# Altium PCB sw108-10.25.PcbDoc (part 2 of 2)
Units mm, origin at the board's own origin, x right, y up, seen from the top; angles counter-clockwise.
Board outline 60 x 92 mm, 2 copper layers (Top Layer, Bottom Layer); 64 components, 32 nets, 243 pads, 39 vias.
Unrouted connection lines stored in the file: 1.
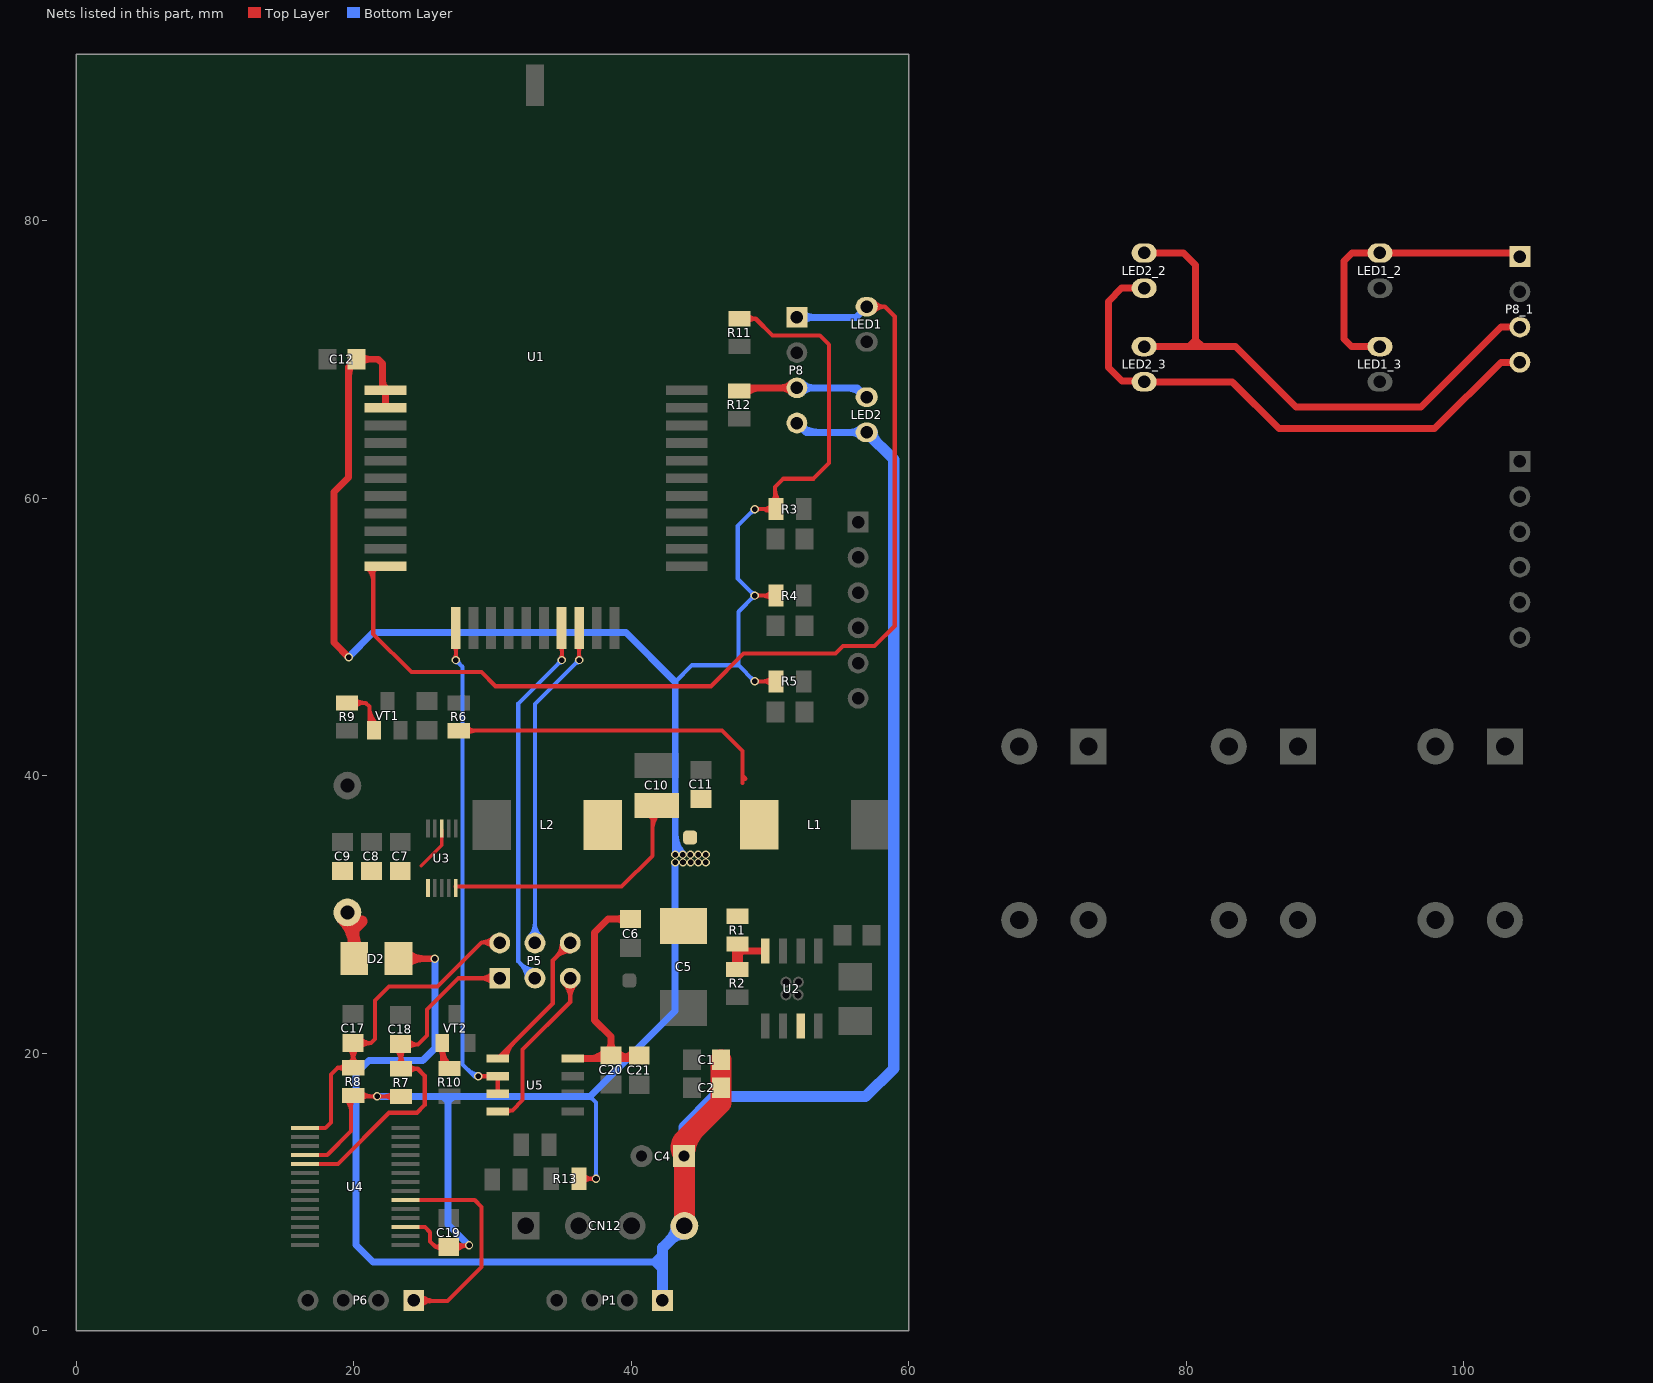
[diagram p2: the nets of this part, all layers, seen from the top]

## Via types
v1: diameter 0.6, hole 0.4, Top Layer to Bottom Layer, 39 vias

## Nets (pads, with @x,y where several pads share a name; then routed paths per layer and width w, separated by ;. In a path a pad name is that pad's centre, name@x,y a point inside that pad or via, vN(x,y) a via of type N, cw(c..) or ccw(c..) an arc to the next point about the centre after c; other vN are vias at no path point) (continued)
NetLED2_2: LED2.2 LED2_2.2 LED2_3.2 P8.3 P8_1.3 R12.2 | length 61.4
  Top Layer w0.5: R12.2@47.79,67.72 48.02,67.95 P8.3@51.95,67.95 ; LED2_3.2@76.974,70.92 83.574,70.92 87.914,66.58 96.934,66.58 102.684,72.33 P8_1.3@104.054,72.33 ; LED2_2.2@76.974,77.67 79.824,77.67 80.684,76.81 80.684,71.41 ; 80.194,70.92 80.684,71.41 ; 81.174,70.92 80.684,71.41 ; 50.743,67.95 cw(c50.743,66.743) 51.596,67.596 ccw(c50.743,66.743) 50.743,67.95 ; 50.743,67.95 ccw(c50.743,69.157) 51.596,68.304 cw(c50.743,69.157) 50.743,67.95 ; R12.2@48.252,67.508 cw(c49.32,66.44) 49.32,67.95 ccw(c49.32,66.44) R12.2@48.252,67.508
  Bottom Layer w0.5: P8.3@51.95,67.95 56.31,67.95 LED2.2@56.98,67.28 ; P8.3@52.304,67.596 cw(c53.157,66.743) 53.157,67.95 cw(c53.157,69.157) P8.3@52.304,68.304 ; 55.383,67.95 cw(c55.383,65.783) LED2.2@56.915,67.315
NetP6_1: P6.1 U4.20 | length 21.9
  Top Layer w0.3: U4.20@23.739,9.41 28.73,9.41 29.22,8.92 29.22,4.59 26.76,2.13 24.38,2.13 P6.1@24.33,2.18 ; P6.1@24.542,2.392 ccw(c25.175,3.025) 25.175,2.13 cw(c25.175,3.025) P6.1@24.542,2.392 ; P6.1@24.754,1.756 cw(c25.658,0.852) 25.658,2.13 ccw(c25.658,0.852) P6.1@24.754,1.756 ; P6.1@24.754,2.604 ccw(c25.899,3.749) 25.899,2.13 cw(c25.899,3.749) P6.1@24.754,2.604
NetR1_1: R1.1 R2.1 U2.4 | length 6
  Top Layer w0.5: 47.66,26.98 48.03,27.35 U2.4@49.676,27.35 ; R1.1@47.757,27.741 ccw(c48.599,28.452) 48.599,27.35 cw(c48.599,28.452) R1.1@47.757,27.741
  Top Layer w0.8: R2.1@47.65,26.03 47.66,26.04 47.66,26.98 R1.1@47.66,27.92
NetR9_1: R9.1 VT1.1 | length 11
  Top Layer w0.3: R9.1@19.53,45.24 20.87,45.24 21.14,44.97 ; VT1.1@21.16,43.51 21.14,43.53 21.14,44.97 ; 20.746,45.24 cw(c20.746,46.206) 20.063,45.523 ccw(c20.746,46.206) 20.746,45.24 ; 20.746,45.24 ccw(c20.746,44.274) 20.063,44.957 cw(c20.746,44.274) 20.746,45.24 ; 21.14,44.97 ccw(c22.876,44.97) 21.714,43.68 cw(c22.876,44.97) 21.14,44.97 ; 21.14,44.296 ccw(c22.269,44.296) 21.513,43.457 cw(c22.269,44.296) 21.14,44.296
NetR10_1: R10.1 VT2.1 | length 9.5
  Top Layer w0.3: VT2.1@26.39,20.73 26.39,19.41 R10.1@26.91,18.89 ; 26.39,19.735 cw(c27.235,19.735) 26.637,20.333 ccw(c27.235,19.735) 26.39,19.735 ; 26.39,19.735 ccw(c25.545,19.735) 26.143,20.333 cw(c25.545,19.735) 26.39,19.735 ; 26.39,19.783 ccw(c27.553,19.783) 26.731,18.961 cw(c27.553,19.783) 26.39,19.783 ; VT2.1@26.39,20.508 ccw(c28.278,20.508) 26.943,19.173 cw(c28.278,20.508) VT2.1@26.39,20.508
PA1: LED1.2 LED1_2.2 LED1_3.2 P8.1 P8_1.1 U1.11 | length 109.7
  Top Layer w0.3: U1.11@21.1,54.98 21.41,54.67 ; U1.11@21.72,54.98 21.41,54.67 ; LED1.2@56.98,73.8 58.28,73.8 ; 21.41,54.67 21.41,50.21 24.16,47.46 29.21,47.46 30.23,46.44 45.76,46.44 48.11,48.79 54.74,48.79 55.28,49.33 57.55,49.33 59,50.78 59,73.08 58.28,73.8 ; 58.28,73.8 cw(c58.28,74.834) 57.497,74.159 ccw(c58.28,74.834) 58.28,73.8 ; 58.28,73.8 ccw(c58.28,72.766) 57.497,73.441 cw(c58.28,72.766) 58.28,73.8 ; U1.11@21.005,54.939 cw(c20.026,53.96) 21.41,53.96 ccw(c20.026,53.96) U1.11@21.005,54.939 ; U1.11@21.136,54.88 cw(c21.122,54.592) 21.41,54.592 ccw(c21.122,54.592) U1.11@21.136,54.88 ; U1.11@21.217,55.151 cw(c20.75,54.684) 21.41,54.684 ccw(c20.75,54.684) U1.11@21.217,55.151 ; U1.11@21.313,54.971 ccw(c21.465,54.871) 21.337,54.743 cw(c21.465,54.871) U1.11@21.313,54.971
  Top Layer w0.5: LED1_3.2@93.974,70.92 91.914,70.92 91.374,71.46 91.374,77.08 91.964,77.67 103.794,77.67 P8_1.1@104.054,77.41
  Bottom Layer w0.5: P8.1@51.95,73.03 56.21,73.03 LED1.2@56.98,73.8 ; 53.157,73.03 cw(c53.157,74.237) 52.304,73.384 ccw(c53.157,74.237) 53.157,73.03 ; 53.157,73.03 ccw(c53.157,71.823) 52.304,72.676 cw(c53.157,71.823) 53.157,73.03
SHINENG: U1.12 U5.2 U5.3 | length 45
  Top Layer w0.3: v1(27.368,48.33) U1.12@27.368,50.643 ; v1(28.98,18.33) 30.384,18.33 U5.2@30.39,18.336 U5.3@30.39,17.066 U5.3@30.336,17.12 ; 27.368,48.692 cw(c27.006,48.692) 27.262,48.436 ccw(c27.006,48.692) 27.368,48.692 ; 27.368,48.692 ccw(c27.73,48.692) 27.474,48.436 cw(c27.73,48.692) 27.368,48.692 ; 27.368,49.01 cw(c27.851,49.01) 27.509,49.352 ccw(c27.851,49.01) 27.368,49.01 ; 27.368,49.01 ccw(c26.885,49.01) 27.227,49.352 cw(c26.885,49.01) 27.368,49.01 ; 29.342,18.33 cw(c29.342,18.692) 29.086,18.436 ccw(c29.342,18.692) 29.342,18.33 ; 29.342,18.33 ccw(c29.342,17.968) 29.086,18.224 cw(c29.342,17.968) 29.342,18.33 ; 30.39,17.428 cw(c30.028,17.428) 30.284,17.172 ccw(c30.028,17.428) 30.39,17.428 ; 30.39,17.428 ccw(c30.752,17.428) 30.496,17.172 cw(c30.752,17.428) 30.39,17.428 ; 30.39,17.974 cw(c30.752,17.974) 30.496,18.23 ccw(c30.752,17.974) 30.39,17.974 ; 30.39,17.974 ccw(c30.028,17.974) 30.284,18.23 cw(c30.028,17.974) 30.39,17.974 ; 29.513,18.33 ccw(c29.513,18.714) 29.784,18.442 cw(c29.513,18.714) 29.513,18.33 ; 29.543,18.33 cw(c29.543,17.989) 29.784,18.23 ccw(c29.543,17.989) 29.543,18.33
  Bottom Layer w0.3: v1(27.368,48.33) 27.37,48.33 27.858,47.842 27.858,19.192 28.72,18.33 v1(28.98,18.33) ; 28.28,18.77 ccw(c28.98,19.47) v1@28.98,18.48 ; v1@27.368,48.18 cw(c27.368,47.813) 27.627,48.073 ccw(c27.368,47.813) v1@27.368,48.18 ; v1@27.518,48.33 ccw(c27.875,48.33) 27.623,48.077 cw(c27.875,48.33) v1@27.518,48.33
UART_RXD: P5.5 U1.19 | length 30.1
  Top Layer w0.3: v1(36.25,48.33) 36.25,50.635 U1.19@36.258,50.643 ; 36.25,48.692 cw(c35.888,48.692) 36.144,48.436 ccw(c35.888,48.692) 36.25,48.692 ; 36.25,48.692 ccw(c36.612,48.692) 36.356,48.436 cw(c36.612,48.692) 36.25,48.692 ; U1.19@36.117,49.352 cw(c35.794,49.029) 36.25,49.029 ccw(c35.794,49.029) U1.19@36.117,49.352 ; 36.25,48.991 cw(c36.76,48.991) 36.399,49.352 ccw(c36.76,48.991) 36.25,48.991
  Bottom Layer w0.3: P5.5@32.646,28.364 ccw(c31.621,29.389) 33.07,29.389 ccw(c34.519,29.389) P5.5@33.494,28.364 ; P5.5@33.07,27.94 33.07,45.15 v1(36.25,48.33) ; 35.994,48.074 cw(c36.25,47.818) 36.25,48.18 ccw(c36.25,47.818) 35.994,48.074 ; 35.994,48.074 ccw(c35.738,48.33) 36.1,48.33 cw(c35.738,48.33) 35.994,48.074
"UART_RXD 485": P5.6 U5.1 | length 19
  Top Layer w0.3: U5.1@30.39,19.606 34.35,23.566 34.35,26.68 P5.6@35.61,27.94 ; 34.586,26.916 cw(c35.61,25.891) 35.61,27.34 ccw(c35.61,25.891) 34.586,26.916 ; 34.586,26.916 ccw(c33.561,27.94) 35.01,27.94 cw(c33.561,27.94) 34.586,26.916 ; U5.1@30.44,19.606 cw(c30.561,19.606) 30.475,19.692 ccw(c30.561,19.606) U5.1@30.44,19.606 ; U5.1@30.74,19.606 cw(c31.585,19.606) 30.987,20.204 ccw(c31.585,19.606) U5.1@30.74,19.606 ; U5.1@31.04,19.606 cw(c32.609,19.606) 31.5,20.716 ccw(c32.609,19.606) U5.1@31.04,19.606
UART_RXD_USB: C18.2 P5.1 R7.1 U4.5 | length 44.3
  Top Layer w0.3: U4.5@16.5,12.01 18.87,12.01 22.56,15.7 24.57,15.7 25.12,16.25 25.12,18.37 24.62,18.87 ; R7.1@23.3,18.75 R7.1@23.42,18.87 ; C18.2@23.37,20.66 C18.2@23.42,20.61 ; P5.1@30.53,25.4 27.55,25.4 25.3,23.15 25.3,21.27 24.64,20.61 ; R7.1@23.42,18.87 24.62,18.87 ; R7.1@23.42,18.87 C18.2@23.42,20.61 ; 23.42,19.836 cw(c22.454,19.836) 23.137,19.153 ccw(c22.454,19.836) 23.42,19.836 ; 23.42,19.836 ccw(c24.386,19.836) 23.703,19.153 cw(c24.386,19.836) 23.42,19.836 ; C18.2@23.42,20.61 24.64,20.61 ; 24.62,18.87 cw(c24.62,19.798) 23.956,19.15 ccw(c24.62,19.798) 24.62,18.87 ; 24.62,18.87 ccw(c24.62,17.942) 23.956,18.59 cw(c24.62,17.942) 24.62,18.87 ; 24.64,20.61 cw(c24.64,21.629) 23.855,20.979 ccw(c24.64,21.629) 24.64,20.61 ; 29.081,25.4 cw(c29.081,23.951) 30.106,24.976 ccw(c29.081,23.951) 29.081,25.4 ; 29.081,25.4 ccw(c29.081,26.849) 30.106,25.824 cw(c29.081,26.849) 29.081,25.4 ; C18.2@23.016,20.306 cw(c22.042,19.332) 23.42,19.332 ccw(c22.042,19.332) C18.2@23.016,20.306 ; 23.42,19.574 cw(c24.456,19.574) 23.724,20.306 ccw(c24.456,19.574) 23.42,19.574 ; C18.2@23.824,20.306 cw(c24.556,19.574) 24.556,20.61 ccw(c24.556,19.574) C18.2@23.824,20.306
UART_TXD: P5.2 U1.18 | length 33.1
  Top Layer w0.3: U1.18@34.988,50.643 35.01,50.621 v1(35.01,48.33) ; 35.01,48.692 cw(c34.648,48.692) 34.904,48.436 ccw(c34.648,48.692) 35.01,48.692 ; 35.01,48.692 ccw(c35.372,48.692) 35.116,48.436 cw(c35.372,48.692) 35.01,48.692 ; U1.18@34.847,49.352 cw(c34.452,48.957) 35.01,48.957 ccw(c34.452,48.957) U1.18@34.847,49.352 ; 35.01,49.063 cw(c35.418,49.063) 35.129,49.352 ccw(c35.418,49.063) 35.01,49.063
  Bottom Layer w0.3: P5.2@32.47,25.4 ccw(c31.021,25.4) 32.046,26.424 ccw(c33.07,27.449) P5.2@33.07,26 ; P5.2@33.07,25.4 31.87,26.6 31.87,45.19 v1(35.01,48.33) ; 34.754,48.074 cw(c35.01,47.818) 35.01,48.18 ccw(c35.01,47.818) 34.754,48.074 ; 34.754,48.074 ccw(c34.498,48.33) 34.86,48.33 cw(c34.498,48.33) 34.754,48.074
"UART_TXD 485": P5.3 U5.4 | length 17.9
  Top Layer w0.3: U5.4@30.39,15.796 30.464,15.87 31.44,15.87 32.18,16.61 32.18,20.26 35.61,23.69 P5.3@35.61,25.4 ; 35.61,23.951 cw(c37.059,23.951) 36.034,24.976 ccw(c37.059,23.951) 35.61,23.951 ; 35.61,23.951 ccw(c34.161,23.951) 35.186,24.976 cw(c34.161,23.951) 35.61,23.951 ; U5.4@30.996,15.69 cw(c31.43,15.256) 31.43,15.87 ccw(c31.43,15.256) U5.4@30.996,15.69
UART_TXD_USB: C17.2 P5.4 R8.1 U4.1 | length 41.2
  Top Layer w0.3: U4.1@16.5,14.61 17.96,14.61 18.36,15.01 18.36,18.45 18.85,18.94 ; C17.2@19.96,20.73 C17.2@19.97,20.72 ; P5.4@30.53,27.94 30.49,27.98 29.23,27.98 ; 18.85,18.94 cw(c18.85,18.194) 19.416,18.68 ccw(c18.85,18.194) 18.85,18.94 ; 18.85,18.94 ccw(c18.85,19.686) 19.416,19.2 cw(c18.85,19.686) 18.85,18.94 ; 18.85,18.94 R8.1@19.97,18.94 C17.2@19.97,20.72 ; 19.97,19.906 cw(c19.004,19.906) 19.687,19.223 ccw(c19.004,19.906) 19.97,19.906 ; 19.97,19.906 ccw(c20.936,19.906) 20.253,19.223 cw(c20.936,19.906) 19.97,19.906 ; C17.2@19.97,20.72 21.26,20.72 ; 21.26,20.72 cw(c21.26,21.887) 20.42,21.077 ccw(c21.26,21.887) 21.26,20.72 ; 21.26,20.72 21.55,21.01 21.55,23.78 22.56,24.79 26.04,24.79 29.23,27.98 ; 29.23,27.98 cw(c29.23,26.94) 30.054,27.574 ccw(c29.23,26.94) 29.23,27.98 ; 29.23,27.98 ccw(c29.23,29.169) 30.094,28.352 cw(c29.23,29.169) 29.23,27.98 ; C17.2@19.606,20.376 cw(c18.729,19.499) 19.97,19.499 ccw(c18.729,19.499) C17.2@19.606,20.376 ; 19.97,19.547 cw(c21.143,19.547) 20.314,20.376 ccw(c21.143,19.547) 19.97,19.547 ; C17.2@20.414,20.376 cw(c21.243,19.547) 21.243,20.72 ccw(c21.243,19.547) C17.2@20.414,20.376
VCC_9V: C7.2 C8.2 C9.2 D2.1 pad.0@19.55,30.14 U3.1 U3.8 | length 18.4
  Top Layer w0.254: 24.88,33.51 26.352,34.982 U3.8@26.352,36.081
  Top Layer w0.8: pad.0@19.46,29.5 20.038,28.922 ; D2.1@20.038,26.814 20.038,28.922 ; 20.616,29.5 20.038,28.922 ; 20.038,28.463 cw(c18.589,28.463) 19.614,27.438 ccw(c18.589,28.463) 20.038,28.463 ; 20.038,28.463 ccw(c21.487,28.463) 20.462,27.438 cw(c21.487,28.463) 20.038,28.463 ; pad.0@19.126,29.716 cw(c16.923,27.513) 20.038,27.513 ccw(c16.923,27.513) pad.0@19.126,29.716 ; pad.0@19.439,29.55 cw(c19.303,28.828) 20.038,28.828 ccw(c19.303,28.828) pad.0@19.439,29.55
VCC_24V: C1.2 C2.2 C4.1 CN12.4 D2.2 LED2.1 LED2_2.1 LED2_3.1 P1.1 P8.4 P8_1.4 U2.7 | length 218.3
  Top Layer w0.5: D2.2@22.97,26.79 22.98,26.8 v1(25.85,26.8) ; LED2_3.1@76.764,68.43 75.394,68.43 74.394,69.43 74.394,74.18 75.344,75.13 LED2_2.1@76.974,75.13 ; LED2_3.1@76.974,68.38 83.324,68.38 86.684,65.02 97.914,65.02 102.684,69.79 P8_1.4@104.054,69.79 ; D2.2@23.768,26.284 cw(c25.015,25.037) 25.015,26.8 ccw(c25.015,25.037) D2.2@23.768,26.284 ; D2.2@23.768,27.344 ccw(c25.082,28.658) 25.082,26.8 cw(c25.082,28.658) D2.2@23.768,27.344
  Top Layer w1.5: CN12.4@43.84,7.55 43.84,13.77 ; C1.2@46.48,19.52 46.47,19.51 46.47,16.4 43.84,13.77 ; 43.84,13.77 ccw(c44.418,13.192) 43.839,12.615 cw(c44.418,13.192) 43.84,13.77 ; C4.1@43.854,12.58 cw(c46.761,12.58) 44.705,14.635 ccw(c46.761,12.58) C4.1@43.854,12.58
  Bottom Layer w0.5: v1(25.85,26.8) 25.85,20.35 24.98,19.48 21.12,19.48 20.18,18.54 20.18,6.17 21.4,4.95 41.62,4.95 ; 42.26,4.31 41.62,4.95 ; 42.26,5.59 41.62,4.95 ; 53.568,64.74 cw(c53.568,67.028) P8.4@51.95,65.41 52.62,64.74 LED2.1@56.98,64.74 ; LED2.1@56.562,64.422 ccw(c55.794,63.654) 55.794,64.74 ccw(c55.794,65.826) LED2.1@56.562,65.058
  Bottom Layer w0.8: P1.1@42.26,2.18 42.26,5.97 CN12.4@43.84,7.55 43.84,12.544 C4.1@43.804,12.58 43.804,14.684 45.98,16.86 56.89,16.86 58.93,18.9 58.93,62.79 LED2.1@56.98,64.74 ; CN12.4@43.24,7.55 cw(c41.791,7.55) 42.816,6.526 cw(c43.84,5.501) CN12.4@43.84,6.95 ; CN12.4@43.416,7.974 ccw(c42.391,8.999) 43.84,8.999 ccw(c45.289,8.999) CN12.4@44.264,7.974 ; LED2.1@57.38,64.74 ccw(c58.346,64.74) 57.663,64.057 ; 42.26,3.025 cw(c41.415,3.025) 42.013,2.427 ccw(c41.415,3.025) 42.26,3.025 ; 42.26,3.025 ccw(c43.105,3.025) 42.507,2.427 cw(c43.105,3.025) 42.26,3.025 ; 43.804,13.546 cw(c42.838,13.546) 43.521,12.863 ccw(c42.838,13.546) 43.804,13.546 ; 43.804,13.546 ccw(c44.77,13.546) 44.087,12.863 cw(c44.77,13.546) 43.804,13.546 ; C4.1@43.521,12.297 cw(c42.751,11.527) 43.84,11.527 ccw(c42.751,11.527) C4.1@43.521,12.297 ; 43.84,11.701 cw(c44.683,11.701) 44.087,12.297 ccw(c44.683,11.701) 43.84,11.701
VDD33: C5.1 C6.2 C10.1 C11.2 C12.2 C19.2 C20.2 C21.2 L1.2 L2.2 pad.4 R1.2 R3.2 R4.2 R5.2 R6.2 R7.2 R8.2 R11.1 R13.2 U1.1 U1.2 U3.5 U4.4 U4.17 U5.8 | length 330.4
  Top Layer w0.3: U4.4@16.5,12.66 18.1,12.66 19.82,14.38 19.82,16.79 R8.2@19.97,16.94 20.03,16.88 23.41,16.88 R7.2@23.48,16.81 ; U4.17@23.739,7.46 25.14,7.46 25.51,7.09 25.51,6.43 25.92,6.02 ; U3.5@27.352,32.006 39.316,32.006 41.53,34.22 41.53,36.89 ; R6.2@27.57,43.24 46.56,43.24 48.02,41.78 48.02,39.49 48.03,39.48 ; R13.2@36.24,10.95 v1(37.47,10.95) ; C21.2@40.376,19.606 C21.2@40.59,19.82 ; C10.1@41.21,37.21 41.53,36.89 ; C10.1@41.85,37.84 41.85,37.21 41.53,36.89 ; R11.1@47.82,72.93 48.98,72.93 ; 48.02,39.99 48.23,39.78 ; v1(48.9,46.79) 49.85,46.79 ; v1(48.9,52.98) 49.85,52.98 ; v1(48.9,59.21) 49.85,59.21 ; R5.2@50.12,46.52 49.85,46.79 ; R5.2@50.12,47.06 49.85,46.79 ; R4.2@50.12,52.71 49.85,52.98 ; R4.2@50.12,53.25 49.85,52.98 ; R3.2@50.12,58.94 49.85,59.21 ; R3.2@50.12,59.48 49.85,59.21 ; R3.2@50.45,59.21 50.38,59.28 50.38,60.81 50.97,61.4 53.14,61.4 54.27,62.53 54.27,71.06 53.6,71.73 50.18,71.73 48.98,72.93 ; 21.328,16.88 cw(c21.328,16.518) 21.584,16.774 ccw(c21.328,16.518) 21.328,16.88 ; 21.328,16.88 ccw(c21.328,17.242) 21.584,16.986 cw(c21.328,17.242) 21.328,16.88 ; 22.052,16.88 cw(c22.052,17.242) 21.796,16.986 ccw(c22.052,17.242) 22.052,16.88 ; 22.052,16.88 ccw(c22.052,16.518) 21.796,16.774 cw(c22.052,16.518) 22.052,16.88 ; 25.92,6.02 cw(c25.92,5.581) 26.308,5.786 ccw(c25.92,5.581) 25.92,6.02 ; 25.92,6.02 ccw(c25.92,6.459) 26.308,6.254 cw(c25.92,6.459) 25.92,6.02 ; 25.92,6.02 C19.2@26.85,6.02 ccw(c26.85,5.98) 26.81,5.98 26.97,6.14 v1(28.32,6.14) ; 27.958,6.14 cw(c27.958,5.778) 28.214,6.034 ccw(c27.958,5.778) 27.958,6.14 ; 27.958,6.14 ccw(c27.958,6.502) 28.214,6.246 cw(c27.958,6.502) 27.958,6.14 ; v1(28.32,6.14) ccw(c28.32,4.817) 27.326,5.69 cw(c28.32,4.817) v1(28.32,6.14) ; 28.786,43.24 cw(c28.786,44.206) 28.103,43.523 ccw(c28.786,44.206) 28.786,43.24 ; 28.786,43.24 ccw(c28.786,42.274) 28.103,42.957 cw(c28.786,42.274) 28.786,43.24 ; 37.108,10.95 cw(c37.108,10.588) 37.364,10.844 ccw(c37.108,10.588) 37.108,10.95 ; 37.108,10.95 ccw(c37.108,11.312) 37.364,11.056 cw(c37.108,11.312) 37.108,10.95 ; v1@37.206,10.95 cw(c37.206,11.916) 36.523,11.233 ccw(c37.206,11.916) v1@37.206,10.95 ; v1@37.206,10.95 ccw(c37.206,9.984) 36.523,10.667 cw(c37.206,9.984) v1@37.206,10.95 ; 48.98,72.93 cw(c48.98,73.765) 48.365,73.2 ccw(c48.98,73.765) 48.98,72.93 ; 48.98,72.93 ccw(c48.98,72.095) 48.365,72.66 cw(c48.98,72.095) 48.98,72.93 ; 49.262,46.79 cw(c49.262,47.152) 49.006,46.896 ccw(c49.262,47.152) 49.262,46.79 ; 49.262,46.79 ccw(c49.262,46.428) 49.006,46.684 cw(c49.262,46.428) 49.262,46.79 ; 49.262,52.98 cw(c49.262,53.342) 49.006,53.086 ccw(c49.262,53.342) 49.262,52.98 ; 49.262,52.98 ccw(c49.262,52.618) 49.006,52.874 cw(c49.262,52.618) 49.262,52.98 ; 49.262,59.21 cw(c49.262,59.572) 49.006,59.316 ccw(c49.262,59.572) 49.262,59.21 ; 49.262,59.21 ccw(c49.262,58.848) 49.006,59.104 cw(c49.262,58.848) 49.262,59.21 ; 49.484,46.79 cw(c49.484,45.824) 50.167,46.507 ccw(c49.484,45.824) 49.484,46.79 ; 49.484,46.79 ccw(c49.484,47.756) 50.167,47.073 cw(c49.484,47.756) 49.484,46.79 ; 49.484,52.98 cw(c49.484,52.014) 50.167,52.697 ccw(c49.484,52.014) 49.484,52.98 ; 49.484,52.98 ccw(c49.484,53.946) 50.167,53.263 cw(c49.484,53.946) 49.484,52.98 ; 49.484,59.21 cw(c49.484,58.244) 50.167,58.927 ccw(c49.484,58.244) 49.484,59.21 ; 49.484,59.21 ccw(c49.484,60.176) 50.167,59.493 cw(c49.484,60.176) 49.484,59.21 ; 49.85,46.79 cw(c49.85,46.54) 50.081,46.636 ccw(c49.85,46.54) 49.85,46.79 ; 49.85,46.79 ccw(c49.85,47.04) 50.081,46.944 cw(c49.85,47.04) 49.85,46.79 ; 49.85,52.98 cw(c49.85,52.73) 50.081,52.826 ccw(c49.85,52.73) 49.85,52.98 ; 49.85,52.98 ccw(c49.85,53.23) 50.081,53.134 cw(c49.85,53.23) 49.85,52.98 ; 49.85,59.21 cw(c49.85,58.96) 50.081,59.056 ccw(c49.85,58.96) 49.85,59.21 ; 49.85,59.21 ccw(c49.85,59.46) 50.081,59.364 cw(c49.85,59.46) 49.85,59.21 ; R8.2@19.437,16.657 cw(c18.513,15.733) 19.82,15.733 ccw(c18.513,15.733) R8.2@19.437,16.657 ; 19.82,16.216 cw(c20.444,16.216) 20.003,16.657 ccw(c20.444,16.216) 19.82,16.216 ; R8.2@20.503,16.657 cw(c21.041,16.119) 21.041,16.88 ccw(c21.041,16.119) R8.2@20.503,16.657 ; R8.2@20.503,17.223 ccw(c21.331,18.051) 21.331,16.88 cw(c21.331,18.051) R8.2@20.503,17.223 ; 22.18,16.88 cw(c22.18,15.88) 22.887,16.587 ccw(c22.18,15.88) 22.18,16.88 ; 22.228,16.88 ccw(c22.228,17.812) 22.887,17.153 cw(c22.228,17.812) 22.228,16.88 ; C19.2@27.1,5.888 cw(c27.657,5.399) 27.657,6.14 ccw(c27.657,5.399) C19.2@27.1,5.888 ; C19.2@27.304,6.374 ccw(c27.867,6.937) 27.867,6.14 cw(c27.867,6.937) C19.2@27.304,6.374 ; C10.1@41.32,37.31 cw(c40.812,36.802) 41.53,36.802 ccw(c40.812,36.802) C10.1@41.32,37.31 ; C10.1@41.333,37.297 cw(c40.897,36.838) 41.53,36.838 ccw(c40.897,36.838) C10.1@41.333,37.297 ; 41.53,35.981 cw(c43.709,35.981) 42.168,37.522 ccw(c43.709,35.981) 41.53,35.981 ; 41.53,36.705 cw(c42.985,36.705) 41.956,37.734 ccw(c42.985,36.705) 41.53,36.705 ; 49.768,52.898 cw(c50.079,52.587) 50.381,52.907 ccw(c50.079,52.587) 49.768,52.898 ; 49.768,59.128 cw(c50.079,58.817) 50.381,59.137 ccw(c50.079,58.817) 49.768,59.128 ; R3.2@50.167,59.743 ccw(c49.653,60.257) 50.38,60.257 cw(c49.653,60.257) R3.2@50.167,59.743 ; 50.38,60.595 ccw(c51.585,60.595) 50.733,59.743 cw(c51.585,60.595) 50.38,60.595
  Top Layer w0.5: v1(19.64,48.53) 18.59,49.58 18.59,60.45 19.64,61.5 19.64,69.45 C12.2@20.2,70.01 21.76,70.01 22.08,69.69 22.08,67.996 U1.1@22.296,67.78 U1.2@22.296,66.51 ; U5.8@35.79,19.606 C21.2@40.376,19.606 ; C20.2@38.55,19.84 38.55,21.19 37.37,22.37 37.37,28.69 38.34,29.66 C6.2@39.96,29.66 ; 21.166,70.01 cw(c21.166,70.976) 20.483,70.293 ccw(c21.166,70.976) 21.166,70.01 ; 21.166,70.01 ccw(c21.166,69.044) 20.483,69.727 cw(c21.166,69.044) 21.166,70.01 ; 38.55,20.806 cw(c37.584,20.806) 38.267,20.123 ccw(c37.584,20.806) 38.55,20.806 ; 38.55,20.806 ccw(c39.516,20.806) 38.833,20.123 cw(c39.516,20.806) 38.55,20.806 ; 38.894,29.66 cw(c38.894,28.694) 39.577,29.377 ccw(c38.894,28.694) 38.894,29.66 ; 38.894,29.66 ccw(c38.894,30.626) 39.577,29.943 cw(c38.894,30.626) 38.894,29.66 ; 19.64,68.799 cw(c21.311,68.799) 20.129,69.981 ccw(c21.311,68.799) 19.64,68.799 ; 22.08,68.543 ccw(c23.059,68.543) 22.367,67.851 cw(c23.059,68.543) 22.08,68.543 ; 36.92,19.606 ccw(c36.92,21.37) 38.167,20.123 cw(c36.92,21.37) 36.92,19.606 ; C20.2@38.933,20.123 ccw(c40.18,21.37) 40.18,19.606 cw(c40.18,21.37) C20.2@38.933,20.123 ; C20.2@39.008,19.606 ccw(c39.008,21.302) 40.207,20.103 cw(c39.008,21.302) C20.2@39.008,19.606
  Bottom Layer w0.3: 37.02,16.88 37.47,16.43 v1(37.47,10.95) ; 43.18,46.76 44.38,47.96 47.73,47.96 ; v1(48.9,46.79) 47.73,47.96 ; v1(48.9,59.21) 47.68,57.99 47.68,54.2 v1(48.9,52.98) 47.73,51.81 47.73,47.96 ; 37.47,11.312 cw(c37.108,11.312) 37.364,11.056 ccw(c37.108,11.312) 37.47,11.312 ; 37.47,11.312 ccw(c37.832,11.312) 37.576,11.056 cw(c37.832,11.312) 37.47,11.312 ; 48.644,47.046 cw(c48.388,46.79) 48.75,46.79 ccw(c48.388,46.79) 48.644,47.046 ; 48.644,47.046 ccw(c48.9,47.302) 48.9,46.94 cw(c48.9,47.302) 48.644,47.046 ; 48.644,52.724 cw(c48.9,52.468) 48.9,52.83 ccw(c48.9,52.468) 48.644,52.724 ; 48.644,52.724 ccw(c48.388,52.98) v1@48.75,52.98 ; 48.644,52.724 ccw(c48.388,52.98) v1@48.75,52.98 ; 48.644,53.236 cw(c48.388,52.98) v1@48.75,52.98 ; 48.644,53.236 ccw(c48.9,53.492) 48.9,53.13 cw(c48.9,53.492) 48.644,53.236 ; 48.644,53.236 cw(c48.388,52.98) v1@48.75,52.98 ; 48.644,58.954 cw(c48.9,58.698) 48.9,59.06 ccw(c48.9,58.698) 48.644,58.954 ; 48.644,58.954 ccw(c48.388,59.21) 48.75,59.21 cw(c48.388,59.21) 48.644,58.954
  Bottom Layer w0.5: v1(19.64,48.53) 21.41,50.3 39.64,50.3 43.18,46.76 v1(43.18,34.31) ; v1(21.69,16.88) 37.02,16.88 43.16,23.02 43.16,33.71 v1(43.19,33.74) ; 26.44,16.88 26.81,16.51 ; 27.18,16.88 26.81,16.51 ; v1(28.32,6.14) 26.81,7.65 26.81,16.51 ; 43.18,35.752 ccw(c45.17,35.752) v1@43.763,34.345
  other v1: 43.737,33.74 44.285,33.74 44.832,33.74 45.38,33.74 43.727,34.31 44.275,34.31 44.822,34.31 45.37,34.31
pads on no net: U1. U1.3 U1.4 U1.5 U1.6 U1.8 U1.9 U1.16 U1.17 U1.20 U1.21 U1.22 U1.23 U1.24 U1.25 U1.26 U1.27 U1.28 U1.29 U2.2 U2.3 U2.5 U4.2 U4.3 U4.6 U4.8 U4.9 U4.10 U4.11 U4.12 U4.14 U4.19 U4.22 U4.24 U4.27 U4.28

## Polygon pours and split planes (outlines as drawn)
VDD33 on Top Layer "Top Layer-No Net" (solid, remove dead copper, pour order 1007): 47.41,39.44 47.41,31.66 46.91,31.16 39.67,31.16 39.22,30.71 39.22,29.19 39.4,29.01 46.53,29.01 46.85,29.33 49.62,29.33 50.81,30.52 50.81,39.53 50.43,39.91 47.88,39.91
VDD33 on Top Layer "Top Layer-No Net" (solid, remove dead copper, pour order 1010): 42.13,29.47 42.13,30.84 42.74,31.45 42.74,36.66 42.2,37.2 42.59,37.59 45.17,37.59 45.8,36.96 45.8,31.62 46.405,31.015 45.52,30.13 44.65,30.13 43.99,29.47
GND on Top Layer "Top Layer-No Net 1" (solid, pour order 1001): 49.2,23.22 48.88,22.9 48.88,22.32 48.88,21.13 48.77,21.02 48.68,20.93 45.48,20.93 45.03,20.48 45.03,20.28 45.03,18.25 44.77,17.99 44.67,17.89 44.04,17.89 44.04,21.69 45.6,23.25 45.73,23.38 49.36,23.38
GND on Top Layer "Top Layer-No Net" (solid, remove dead copper, pour order 1004): 42.21,19.89 42.21,21.7 42,21.91 39.02,21.91 38.11,22.82 38.11,27.49 38.84,28.22 40.63,28.22 40.93,27.92 40.93,25.68 41.78,24.83 46.59,24.83 47.09,24.33 47.09,23.21 44.72,20.84 44.72,20.3 44.31,19.89
GND on Top Layer "Top Layer" (solid, pour order 1000): 46.98,66.26 46.98,65.6 46.84,65.46 46.84,64.17 46.99,64.02 48.46,64.02 48.66,64.22 48.66,66.2 48.6,66.26
GND on Top Layer "Top Layer-No Net" (solid, remove dead copper, pour order 1000): 57.45,26.6 54.79,26.6 54.12,25.93 49.24,25.93 49.09,25.78 49.09,24.92 48.9,24.73 46.69,24.73 46.6,24.64 46.6,23.33 46.71,23.22 49.2,23.22 49.36,23.38 53.35,23.38 54.32,24.35 57.5,24.35 57.66,24.51 57.66,26.39
VCC_24V on Top Layer "Top Layer-No Net" (solid, remove dead copper, pour order 1001): 51.81,22.81 51.81,20.98 51.2,20.37 45.88,20.37 45.73,20.22 45.73,18.82 46.47,18.08 46.9,18.08 47.59,18.77 52.17,18.77 52.7,19.3 52.7,22.74 52.57,22.87 51.87,22.87
NetC3_2 on Top Layer "Top Layer-No Net" (solid, remove dead copper, pour order 1002): 53.19,22.85 54.1,22.85 54.9,23.65 57.64,23.65 58.16,24.17 58.16,26.98 57.39,27.75 57.39,31.57 55.82,33.14 55.82,40.21 56.29,40.68 59.26,40.68 59.58,40.36 59.58,20.37 59.07,19.86 53.56,19.86 53.12,20.3 53.12,22.78
GND on Top Layer "Top Layer-No Net" (solid, remove dead copper, pour order 1003): 38.85,1.44 38.85,13.56 37.01,15.4 36.16,15.4 36.05,15.51 36.05,16.04 36.1,16.09 36.83,16.09 37.55,16.81 37.55,17.99 37.8,18.24 42.05,18.24 42.21,18.4 42.21,19.89 42.62,20.3 44.72,20.3 44.77,20.25 44.77,17.14 41.93,14.3 41.93,6.49 40.85,5.41 40.85,1.43 40.59,1.17 39.12,1.17
VCC_9V on Top Layer "Top Layer-No Net" (solid, remove dead copper, pour order 1005): 18.22,29.09 23.15,29.09 25.41,31.35 25.41,33.35 24.98,33.78 18.38,33.78 17.91,33.31 17.91,29.4
GND on Top Layer "Top Layer-No Net" (solid, remove dead copper, pour order 1006): 18.11,34.54 24.51,34.54 25.45,35.48 25.45,39.72 24.51,40.66 18.25,40.66 17.77,40.18 17.77,34.88
VDD33 on Top Layer "Top Layer-No Net" (solid, remove dead copper, pour order 1008): 36.47,33.01 39.18,33.01 40.78,34.61 40.78,36.79 40.95,36.96 45.8,36.96 46,37.16 46,38.7 45.82,38.88 36.61,38.88 36.14,38.41 36.14,33.34
GND on Top Layer "Top Layer-No Net" (solid, remove dead copper, pour order 1009): 23.934,37.504 26.29,39.86 45.87,39.86 46.05,40.04 46.05,41.93 45.84,42.14 24.93,42.14 23.074,40.284
GND on Top Layer "Top Layer-No Net" (solid, remove dead copper, pour order 1011): 26.8,36.67 26.8,34.66 25.81,33.67 25.81,31.46 25.87,31.4 26.83,31.4 26.9,31.47 26.9,32.75 27.83,33.68 27.83,36.67 27.77,36.73 26.86,36.73
PA1 on Top Layer "Top Layer-No Net 1" (solid, pour order 1000): 102.784,76.52 105.164,76.52 105.344,76.7 105.344,78.14 105.184,78.3 102.764,78.3 102.624,78.16 102.624,76.68
NetLED1_1 on Top Layer "Top Layer-No Net 1" (solid, pour order 1001): 102.784,73.98 105.164,73.98 105.344,74.16 105.344,75.6 105.184,75.76 102.764,75.76 102.624,75.62 102.624,74.14
NetLED2_2 on Top Layer "Top Layer-No Net 1" (solid, pour order 1002): 102.784,71.44 105.164,71.44 105.344,71.62 105.344,73.06 105.184,73.22 102.764,73.22 102.624,73.08 102.624,71.6
VCC_24V on Top Layer "Top Layer-No Net 1" (solid, pour order 1003): 102.784,68.9 105.164,68.9 105.344,69.08 105.344,70.52 105.184,70.68 102.764,70.68 102.624,70.54 102.624,69.06
KEY1 on Top Layer "Top Layer-No Net 1" (solid, pour order 1004): 102.784,61.76 105.164,61.76 105.344,61.94 105.344,63.38 105.184,63.54 102.764,63.54 102.624,63.4 102.624,61.92
KEY2 on Top Layer "Top Layer-No Net 1" (solid, pour order 1005): 102.784,56.68 105.164,56.68 105.344,56.86 105.344,58.3 105.184,58.46 102.764,58.46 102.624,58.32 102.624,56.84
KEY3 on Top Layer "Top Layer-No Net 1" (solid, pour order 1006): 102.784,51.6 105.164,51.6 105.344,51.78 105.344,53.22 105.184,53.38 102.764,53.38 102.624,53.24 102.624,51.76
GND on Bottom Layer "Top Layer-No Net 1" (solid, remove dead copper, pour order 1005): 11.62,0.68 49.18,0.68 59.39,10.89 59.39,81.12 55.35,85.16 46.26,85.16 45.07,83.97 45.07,53.13 43.69,51.75 18.78,51.75 17.89,50.86 17.89,16.41 17.35,15.87 7.39,15.87 6.23,14.71 6.23,6.07
VDD33 on Bottom Layer "Top Layer-No Net 1" (solid, pour order 1003): 42.88,33.11 45.64,33.11 45.78,33.25 45.78,34.71 45.67,34.82 42.85,34.82 42.74,34.71 42.74,33.25
GND on Bottom Layer "Top Layer-No Net 1" (solid, pour order 1002): 17.927,66.333 15.8,68.46 15.8,70.75 16.16,71.11 21.35,71.11 21.77,70.69 21.77,52.12 22.53,51.36 22.19,51.02 20.37,51.02 20.114,50.764 17.927,50.764
NetLED2_2 on Bottom Layer "Top Layer-No Net 1" (solid, pour order 1007): 75.704,76.78 78.084,76.78 78.264,76.96 78.264,78.4 78.104,78.56 75.684,78.56 75.544,78.42 75.544,76.94
VCC_24V on Bottom Layer "Top Layer-No Net 1" (solid, pour order 1008): 75.7,74.25 78.08,74.25 78.26,74.43 78.26,75.87 78.1,76.03 75.68,76.03 75.54,75.89 75.54,74.41
NetLED2_2 on Bottom Layer "Top Layer-No Net 1" (solid, pour order 1009): 75.704,70.03 78.084,70.03 78.264,70.21 78.264,71.65 78.104,71.81 75.684,71.81 75.544,71.67 75.544,70.19
VCC_24V on Bottom Layer "Top Layer-No Net 1" (solid, pour order 1010): 75.704,67.49 78.084,67.49 78.264,67.67 78.264,69.11 78.104,69.27 75.684,69.27 75.544,69.13 75.544,67.65
PA1 on Bottom Layer "Top Layer-No Net 1" (solid, pour order 1011): 92.704,76.78 95.084,76.78 95.264,76.96 95.264,78.4 95.104,78.56 92.684,78.56 92.544,78.42 92.544,76.94
PA1 on Bottom Layer "Top Layer-No Net 1" (solid, remove dead copper, pour order 1012): 92.704,70.03 95.084,70.03 95.264,70.21 95.264,71.65 95.104,71.81 92.684,71.81 92.544,71.67 92.544,70.19
NetLED1_1 on Bottom Layer "Top Layer-No Net 1" (solid, pour order 1013): 92.704,74.24 95.084,74.24 95.264,74.42 95.264,75.86 95.104,76.02 92.684,76.02 92.544,75.88 92.544,74.4
NetLED1_1 on Bottom Layer "Top Layer-No Net 1" (solid, pour order 1014): 92.704,67.49 95.084,67.49 95.264,67.67 95.264,69.11 95.104,69.27 92.684,69.27 92.544,69.13 92.544,67.65
GND on Bottom Layer "Top Layer-No Net 1" (solid, remove dead copper, pour order 1015): 61.244,25.73 109.594,25.73 110.614,26.75 110.614,63.76 109.594,64.78 61.824,64.78 60.484,63.44 60.484,26.49 61.244,25.73

## Keep-outs
Keep-Out Layer:
  circle w0.254: c50,11 r1.7
  circle w0.254: c50,81 r1.7
  circle w0.254: c10,81 r1.7
  circle w0.254: c10,11 r1.7
  circle w0.254: c61.98,30.232 r1
  circle w0.254: c61.98,41.669 r1
  circle w0.254: c61.98,53.107 r1
  circle w0.254: c61.98,75.982 r1
  circle w0.254: c61.98,64.544 r1
  circle w0.254: c108.735,41.668 r1
  circle w0.254: c108.735,30.23 r1
  circle w0.254: c108.735,53.105 r1
  circle w0.254: c108.735,64.543 r1
  circle w0.254: c108.735,75.98 r1
  circle w0.15: c76.974,55.81 r2
  circle w0.15: c93.974,55.81 r2
  lines w0.254: 5.8,9.27 5.8,15.23 ; 5.8,67.77 5.8,82.75 ; 5.81,9.27 11,4.08 11,1.016 ccw(c12.016,1.016) 12.016,0 13,0 47,0 47.73,0 ccw(c47.73,1.27) 49,1.27 49,4.07 55.93,11 58.801,11 ccw(c58.801,12.199) 60,12.199 60,13 60,79.928 ccw(c58.928,79.928) 58.928,81 55.93,81 49,87.93 49,90.805 ccw(c47.805,90.805) 47.805,92 ; 5.81,15.23 cw(c7.08,15.23) 7.08,16.5 10.49,16.5 17,16.5 ccw(c17,16.89) 17.39,16.89 17.39,18.39 17.39,66.11 ccw(c17,66.11) 17,66.5 8.88,66.5 7.08,66.5 cw(c7.08,67.77) 5.81,67.77 ; 5.81,82.75 11,87.94 11,90.73 ; 11,90.678 11,90.73 ; 12.27,92 ccw(c12.27,90.73) 11,90.73 ; 13.28,92 14.01,92 48.01,92 ; 59.97,42.62 59.97,79.71 cw(c61.24,79.71) 61.24,80.98 104.294,80.98 109.474,80.98 109.704,80.98 cw(c109.704,79.71) 110.974,79.71 110.974,31.08 110.974,26.502 cw(c109.704,26.502) 109.704,25.232 109.474,25.232 106.214,25.232 64.56,25.232 61.25,25.232 ; 59.97,42.972 59.97,38.708 59.97,26.263 ccw(c61.002,26.263) 61.002,25.232 61.93,25.232

## Silkscreen, mask and mechanical layers (free items; w line width, h text height)
Top Overlay:
  circle w0.15: c19.55,30.14 r1.422
  circle w0.15: c19.55,39.28 r1.422
  circle w0.254: c10,81 r3
  circle w0.254: c50,81 r3
  circle w0.254: c50,11 r3
  circle w0.254: c10,11 r3
  lines w0.254: 41.27,31.21 42.09,31.21 ; 41.69,30.82 41.69,31.64 ; 43.74,36.8 44.56,36.8 ; 44.16,36.41 44.16,37.23 ; 54.2,63.53 55.02,63.53 ; 54.31,70.4 55.13,70.4 ; 54.62,63.14 54.62,63.96 ; 54.73,69.98 54.73,70.8 ; 73.054,66.65 73.054,79.47 74.234,80.65 80.204,80.65 81.154,79.7 81.154,66.68 80.114,65.64 74.064,65.64 73.054,66.65
  text "24V" at 76.034,65.94 h0.8
  text "KEY1" at 59.51,57.13 h0.8 r90
  text "KEY2" at 59.55,51.76 h0.8 r90
  text "KEY3" at 59.55,46.66 h0.8 r90
  text "GND" at 21.34,38.85 h0.8
  text "3.3V" at 40.34,35.17 h0.8
  text "DC 9V" at 21.36,30.41 h0.8
  text "GND" at 38.56,23.27 h0.8
  text "GND" at 37.87,9.27 h0.8
  text "+24V" at 44,9.11 h0.8
  text "485_B" at 30.22,4.8 h0.8
  text "485_A" at 34.48,4.8 h0.8
  text "GND" at 39.25,4.667 h0.8
  text "+24V" at 42.15,4.667 h0.8
  text "GND" at 15.67,4.31 h0.8
  text "VCC" at 23.62,4.32 h0.8
  text "D-" at 19.07,4.29 h0.8
  text "D+" at 21.63,4.29 h0.8
Top Solder:
  rectangle: 50.34,23.52 52.85,25.8

## Dimensions
14.01,92 to 13,0 on Keep-Out Layer
59.97,79.71 to 110.974,79.71 on Keep-Out Layer
5.8,67.77 to 60,79.928 on Keep-Out Layer

## Text inside footprints (layer, text, board x,y; h text height)
L1: Top Overlay "GS" at 52.56,35.92 h0.8
L2: Top Overlay "GS" at 33.19,35.85 h0.8
P1: Top Overlay "4" at 33.24,3.04 h0.8; Top Overlay "1" at 43.45,2.82 h0.8
P5: Top Overlay "4" at 28.3,28.15 h0.8; Top Overlay "1" at 28.49,24.34 h0.8; Top Overlay "3" at 37.37,24.9 h0.8; Top Overlay "6" at 37.37,27.89 h0.8
P6: Top Overlay "4" at 15.24,2.99 h0.8; Top Overlay "1" at 25.57,3.01 h0.8
P7: Top Overlay "6" at 54.75,44.51 h0.8; Top Overlay "1" at 54.83,58.82 h0.8
P7_1: Top Overlay "6" at 102.444,48.89 h0.8; Top Overlay "1" at 102.524,63.2 h0.8
P8: Top Overlay "1" at 50.43,73.65 h0.8; Top Overlay "4" at 50.42,63.76 h0.8
P8_1: Top Overlay "1" at 102.534,78.03 h0.8; Top Overlay "4" at 102.524,68.14 h0.8